# EAGLE board boardv01 (EAGLE 9.6.2)
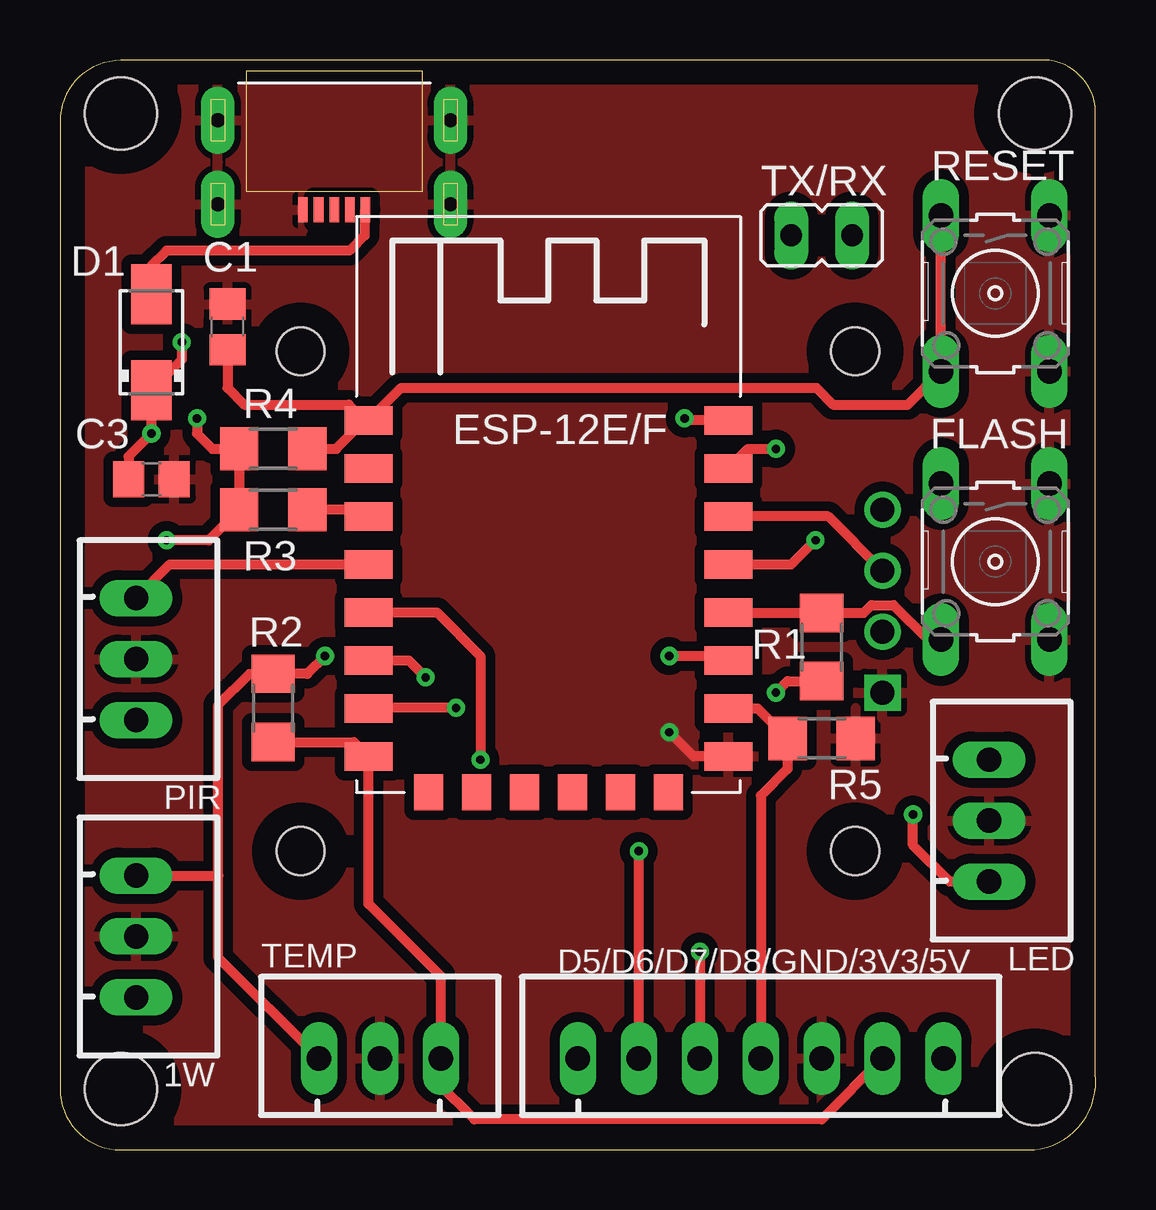
[diagram p0: board, top side]
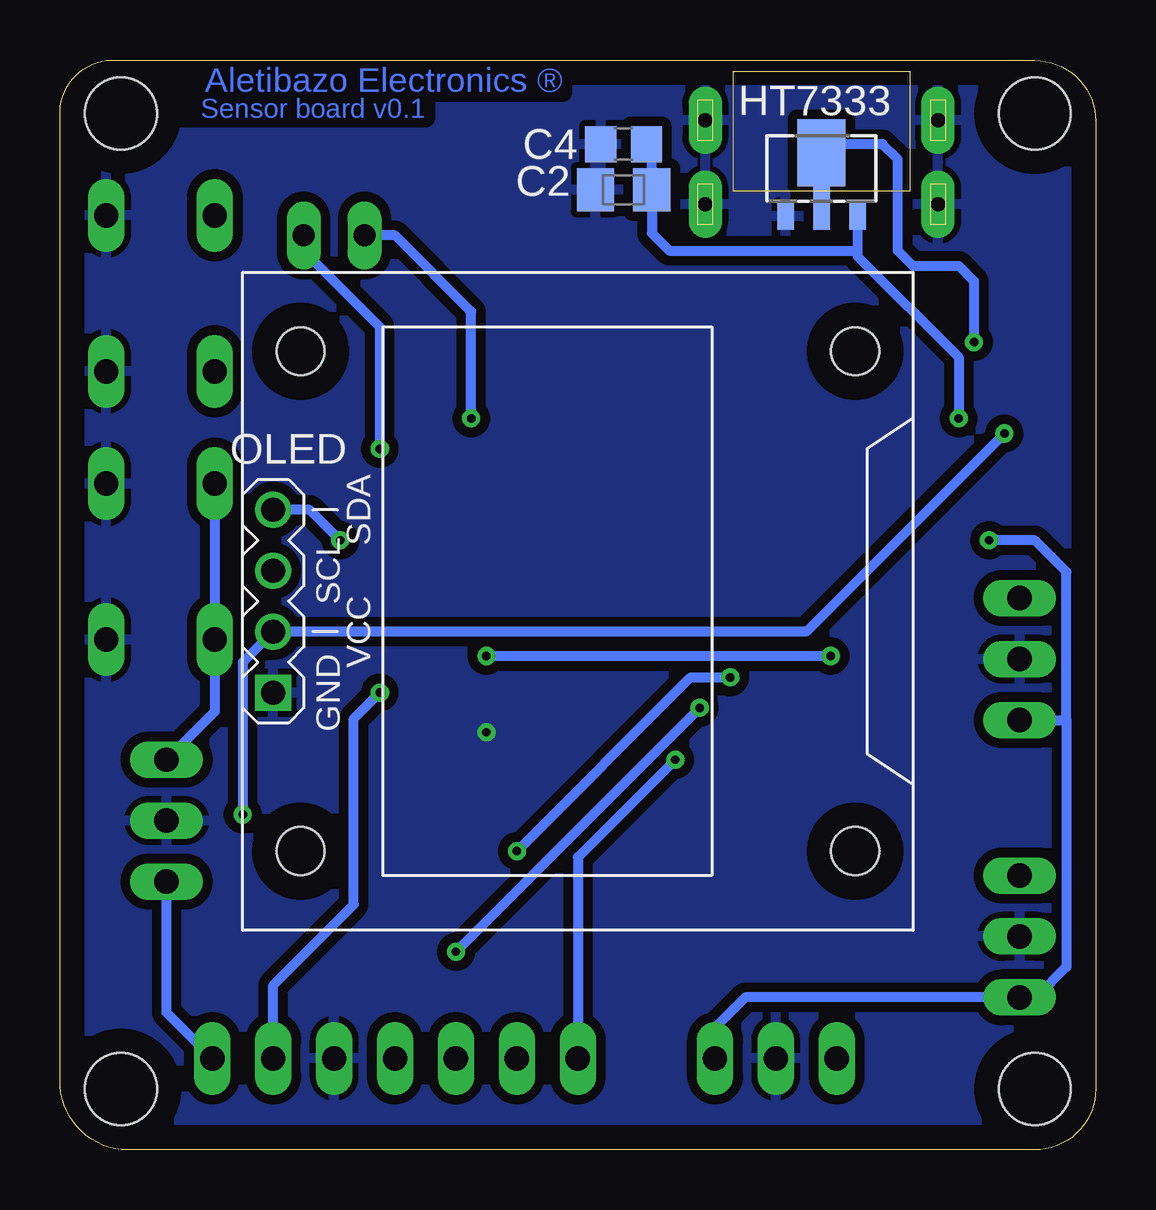
[diagram p1: board, bottom side, seen from below]

Size 43.18 x 45.41 mm. Coordinates in mm from the lower left corner, seen from the top.
Outline: 0,42.85 0,2.54 arc90 2.54,0 40.62,0 arc90 43.16,3.18 43.16,43.48 arc90 40.62,45.39 2.54,45.39 arc90 0,42.85
Copper layers (1*16): Top 0.035mm / dielectric 1.5mm / Bottom 0.035mm
Design rules "default": minimum track width 6mil, minimum drill 0.35mm, track to track 6mil, track to pad 6mil, pad to pad 6mil, via to via 6mil, smd to smd 6mil, copper to edge 40mil, drill to drill 6mil, minimum pad ring 10mil, minimum via ring 8mil, stop-mask expansion 4mil, vias tented up to drill 0mil, thermal gap 10mil
Holes 3 mm at 2.54,43.18 2.54,2.54 40.64,2.54 40.64,43.18

## Footprints (pad centres in the part's own frame; a part is rotated, then mirrored left to right if it is on the bottom)
JST-XH-03-PACKAGE-LONG-PAD = drill 1.016 long: 1 -2.54,0; 2 0,0; 3 2.54,0
C0805 = smd 1.3 x 1.5: 1 -0.95,0; 2 0.95,0
R/2012-12R = smd 1.55 x 1.8: + 1.175,0; - -1.175,0
DO214AC = smd 2.5 x 1.7: A 2,0; C -2,0
JST-XH-07-PACKAGE-LONG-PAD = drill 1.016 long: 1 -7.62,0; 2 -5.08,0; 3 -2.54,0; 4 0,0; 5 2.54,0; 6 5.08,0; 7 7.62,0
B3F-10XX = drill 1.016 long: 1 -3.251,2.261; 2 3.251,2.261; 3 -3.251,-2.261; 4 3.251,-2.261
SOT-89 = smd 0.7 x 1.1: 1 1.5,-2.385; 2 -1.5,-2.385 | smd 0.7 x 1.8: 3 0,-2.035 | smd 2 x 2.8: 4 0,0.265
ESP-12E = smd 2 x 1.2: ADC -7.46,5.53; EN -7.46,3.53; GND 7.54,-6.47; IO0 7.54,-0.47; IO2 7.54,-2.47; IO4 7.54,1.53; IO5 7.54,3.53; IO12 -7.46,-2.47; IO13 -7.46,-4.47; IO14 -7.46,-0.47; IO15 7.54,-4.47; IO16 -7.46,1.53; RST -7.46,7.53; RXD/IO3 7.54,5.53; TXD/IO1 7.54,7.53; VCC -7.46,-6.47 | smd 1.2 x 1.5: CS0 -4.96,-7.97; IO9 -0.96,-7.97; IO10 1.04,-7.97; MISO -2.96,-7.97; MOSI 3.04,-7.97; SCLK 5.04,-7.97
DISPLAY-OLED-128X64-I2C = drill 1 square: 1 -3.81,12.7 | drill 1: 2 -1.27,12.7; 3 1.27,12.7; 4 3.81,12.7 | hole 2: -10.414,11.557; 10.414,11.557; 10.414,-11.557; -10.414,-11.557
R1206 = smd 1.6 x 1.803: 1 -1.422,0; 2 1.422,0
JP1 = drill 0.914 long: 1 0,-1.27; 2 0,1.27
MICRO-USB-2 = smd 0.4 x 1.05: 1 -1.3,5.275; 2 -0.65,5.275; 3 0,5.275; 4 0.65,5.275; 5 1.3,5.275 | drill 0.6 pad 1.4 long: P$1 -4.85,5.05; P$2 -4.85,1.55; P$3 4.85,5.05; P$4 4.85,1.55

## Placement (x,y rotation side)
1W  JST-XH-03-PIN-LONG-PAD  [JST-XH-03-PACKAGE-LONG-PAD]  3.17,8.89 270 top
C1  100nF  [C0805]  6.98,34.29 90 top
C2  100nF  [R/2012-12R]  19.69,40.01 0 bottom
C3  10uF 25V  [C0805]  3.81,27.94 0 top
C4  10uF  [C0805]  19.69,41.91 180 bottom
D1  SMAJ5.0A  [DO214AC]  3.81,33.66 90 top
D5/D6/D7/D8/GND/3V3/5V  JST-XH-07-PIN-LONG-PAD  [JST-XH-07-PACKAGE-LONG-PAD]  29.21,3.81 0 top
FLASH  [B3F-10XX]  38.99,24.51 270 top
HT7333  HT7333  [SOT-89]  11.43,41.27 0 bottom
IC1  ESP-12E/F  [ESP-12E]  20.32,22.86 0 top
LED  JST-XH-03-PIN-LONG-PAD  [JST-XH-03-PACKAGE-LONG-PAD]  38.73,13.72 270 top
OLED  DISPLAY-OLED-128X64-I2C  [DISPLAY-OLED-128X64-I2C]  21.59,22.86 90 bottom
PIR  JST-XH-03-PIN-LONG-PAD  [JST-XH-03-PACKAGE-LONG-PAD]  3.17,20.45 270 top
R1  12K  [R1206]  31.75,20.95 90 top
R2  12K  [R1206]  8.89,18.41 90 top
R3  12K  [R1206]  8.89,26.67 0 top
R4  12K  [R1206]  8.89,29.21 0 top
R5  12K  [R1206]  31.75,17.14 180 top
RESET  [B3F-10XX]  38.99,35.69 270 top
TEMP  JST-XH-03-PIN-LONG-PAD  [JST-XH-03-PACKAGE-LONG-PAD]  13.33,3.81 0 top
TX/RX  [JP1]  31.75,38.1 270 top
USB  MICRO-USBV2  [MICRO-USB-2]  11.43,44.45 180 top

## Library data of the parts
1W D5/D6/D7/D8/GND/3V3/5V LED PIR TEMP = Rembrandt Electronics - JST XH Connectors v1-0
C1-C4 R2-R5 = resistor
D1 = smaj_10; MF: Littelfuse; MPN: SMAJ5.0A; OC_FARNELL: 1827607; OC_NEWARK: 71J2029
FLASH RESET = switch-omron; MPN: B3F-1000; OC_FARNELL: 176432; OC_NEWARK: 36M3542
HT7333 = holtek2
IC1 = esp-12e-f
OLED = diy-modules
R1 = resistor; SPICEPREFIX: R
TX/RX = jumper
USB = microusb

## Nets
3V3: 1W.3 C2.+ C4.1 D5/D6/D7/D8/GND/3V3/5V.6 HT7333.1 IC1.VCC PIR.3 R1.1 R2.1 R3.1 R4.1 TEMP.3
D0: IC1.IO16 PIR.1
D1: IC1.IO5 OLED.3
D2: IC1.IO4 OLED.4
D3: FLASH.3 FLASH.4 IC1.IO0 LED.1 R1.2
D4: 1W.1 IC1.IO2 R2.2 TEMP.1
D5: D5/D6/D7/D8/GND/3V3/5V.1 IC1.IO14
D6: D5/D6/D7/D8/GND/3V3/5V.2 IC1.IO12
D7: D5/D6/D7/D8/GND/3V3/5V.3 IC1.IO13
D8: D5/D6/D7/D8/GND/3V3/5V.4 IC1.IO15 R5.2
EN: IC1.EN R3.2
GND: 1W.2 C1.2 C2.- C3.2 C4.2 D5/D6/D7/D8/GND/3V3/5V.5 FLASH.1 FLASH.2 HT7333.2 IC1.GND LED.2 OLED.1 PIR.2 R5.1 RESET.1 RESET.2 TEMP.2 USB.5 USB.P$1 USB.P$2 USB.P$3 USB.P$4
RST: C1.1 IC1.RST R4.2 RESET.3 RESET.4
RX: IC1.RXD/IO3 TX/RX.2
TX: IC1.TXD/IO1 TX/RX.1
VDD5V: C3.1 D1.C D5/D6/D7/D8/GND/3V3/5V.7 HT7333.3 HT7333.4 LED.3 OLED.2
VDDUSB: D1.A USB.1

## Tracks (layer width: path | path; a pad name or v marks a point on that pad's centre or on a via)
3V3  (via drill 0.35)
  Top 0.406: D5/D6/D7/D8/GND/3V3/5V.6 31.75,1.27 17.27,1.27 15.75,2.79 15.75,3.68 TEMP.3 15.87,7.24 12.86,10.25 IC1.VCC 12.26,16.99 R2.1 | v29.84,19.05 30.33,19.53 R1.1 | v5.71,30.48 5.71,29.84 6.35,29.21 R4.1 R3.1 6.2,25.4 v4.44,25.4
  Bottom 0.406: v29.84,19.05 30.93,17.97 30.93,10.22 34.29,6.86 D5/D6/D7/D8/GND/3V3/5V.6 | v5.71,30.48 5.71,33.02 9.93,37.23 9.93,37.47 | TEMP.3 15.87,5.08 14.6,6.35 1W.3 2.49,6.35 1.22,7.62 1.22,17.91 | HT7333.1 9.93,37.47 | 9.93,37.47 17.78,37.47 18.51,38.2 C2.+ 18.51,41.69 C4.1 | PIR.3 1.22,17.91 | v4.44,25.4 2.54,25.4 1.22,24.08 1.22,17.91
D0
  Top 0.406: PIR.1 4.58,24.39 IC1.IO16
D1
  Top 0.406: OLED.3 32.03,26.39 IC1.IO5
D2  (via drill 0.35)
  Top 0.406: IC1.IO4 30.49,24.39 v31.5,25.4
  Bottom 0.406: v31.5,25.4 32.77,26.67 OLED.4
D3
  Top 0.406: IC1.IO0 27.87,22.38 R1.2 33.51,22.38 33.83,22.7 34.75,22.7 36.19,21.26 FLASH.4
  Bottom 0.406: FLASH.3 FLASH.4 36.73,18.26 LED.1
D4  (via drill 0.35)
  Top 0.406: IC1.IO2 27.68,20.57 v25.4,20.57 | v11.05,20.57 10.31,19.84 R2.2 7.9,19.84 6.6,18.54 6.6,11.43 | TEMP.1 6.6,8 6.6,11.43 | 1W.1 6.6,11.43
  Bottom 0.406: v11.05,20.57 v25.4,20.57
D5  (via drill 0.35)
  Top 0.406: IC1.IO14 15.71,22.39 17.53,20.57 v17.53,16.26
  Bottom 0.406: v17.53,16.26 21.59,12.19 D5/D6/D7/D8/GND/3V3/5V.1
D6  (via drill 0.35)
  Top 0.406: IC1.IO12 14.53,20.39 v15.24,19.68 | D5/D6/D7/D8/GND/3V3/5V.2 v24.13,12.45
  Bottom 0.406: v24.13,12.45 16.89,19.68 v15.24,19.68
D7  (via drill 0.35)
  Top 0.406: v26.67,8.25 D5/D6/D7/D8/GND/3V3/5V.3 | v16.51,18.41 12.88,18.41 IC1.IO13
  Bottom 0.406: v16.51,18.41 v26.67,8.25
D8
  Top 0.406: IC1.IO15 29.08,18.39 R5.2 30.33,15.88 29.21,14.76 D5/D6/D7/D8/GND/3V3/5V.4
EN
  Top 0.406: IC1.EN 12.58,26.67 R3.2
GND  (via drill 0.35)
  Top 0.406: IC1.GND 26.41,16.39 v25.4,17.4
  pour Top (isolate 0.406): -12.7,49.53 -12.7,-3.81 50.8,-3.81 50.8,49.53
  pour Bottom (isolate 0.406): -11.43,48.26 -11.43,-2.54 49.53,-2.54 49.53,48.26
RST
  Top 0.406: 12.7,30.39 IC1.RST 14.22,31.75 31.53,31.75 32.23,31.05 35.35,31.05 RESET.4 RESET.3 | R4.2 11.52,29.21 12.7,30.39 | C1.1 6.98,31.75 7.68,31.05 12.03,31.05 12.7,30.39
RX  (via drill 0.35)
  Top 0.406: IC1.RXD/IO3 28.68,29.21 v29.84,29.21
  Bottom 0.406: TX/RX.2 33.02,37.47 29.84,34.29 v29.84,29.21
TX  (via drill 0.35)
  Top 0.406: IC1.TXD/IO1 26.12,30.39 v26.04,30.48
  Bottom 0.406: v26.04,30.48 26.04,34.92 29.21,38.1 TX/RX.1
VDD5V  (via drill 0.35)
  Top 0.406: v5.08,33.66 5.08,32.92 D1.C v3.81,29.84 2.86,28.9 C3.1 | LED.3 37.08,11.18 35.56,12.7 v35.56,13.97
  Bottom 0.406: HT7333.3 HT7333.4 11.43,41.91 8.89,41.91 8.26,41.27 8.26,37.47 7.62,36.83 5.71,36.83 5.08,36.2 v5.08,33.66 | v3.81,29.84 12.06,21.59 OLED.2 35.56,20.32 v35.56,13.97 | D5/D6/D7/D8/GND/3V3/5V.7 38.73,5.71 LED.3
VDDUSB
  Top 0.406: D1.A 3.81,36.83 4.44,37.47 12.06,37.47 12.7,38.1 12.7,39.15 USB.1

## Text on the board
Bottom: Aletibazo Electronics ® | Sensor board v0.1